# Altium PCB Energy-Meter.PcbDoc
Units mm, origin at the board's own origin, x right, y up, seen from the top; angles counter-clockwise.
Board outline 75 x 75 mm, 2 copper layers (Top Layer, Bottom Layer); 45 components, 30 nets, 147 pads, 8 vias.
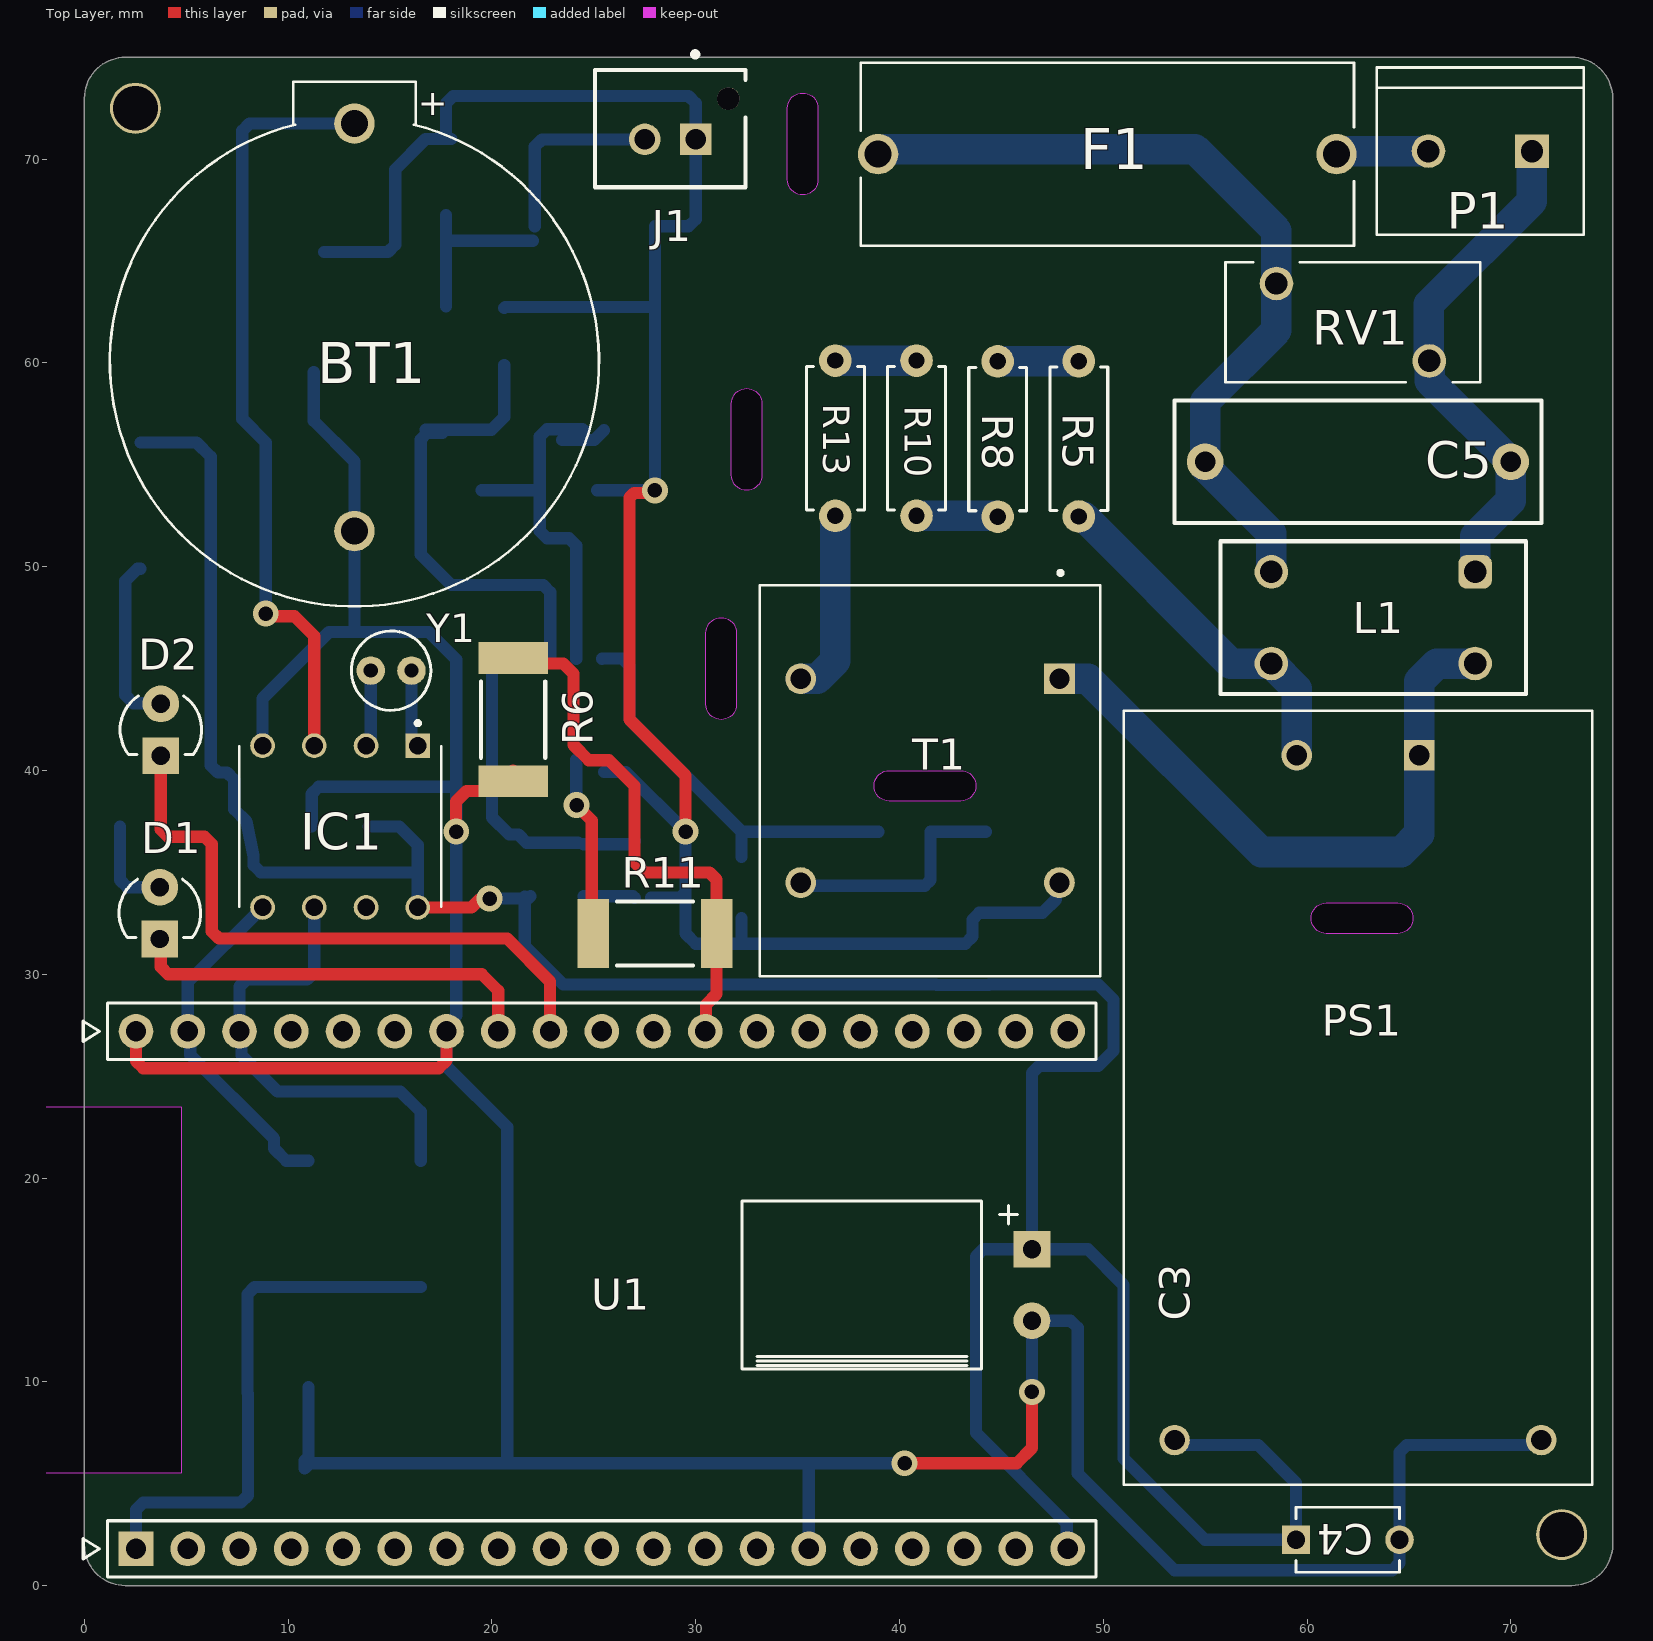
[diagram p0: Top Layer view]
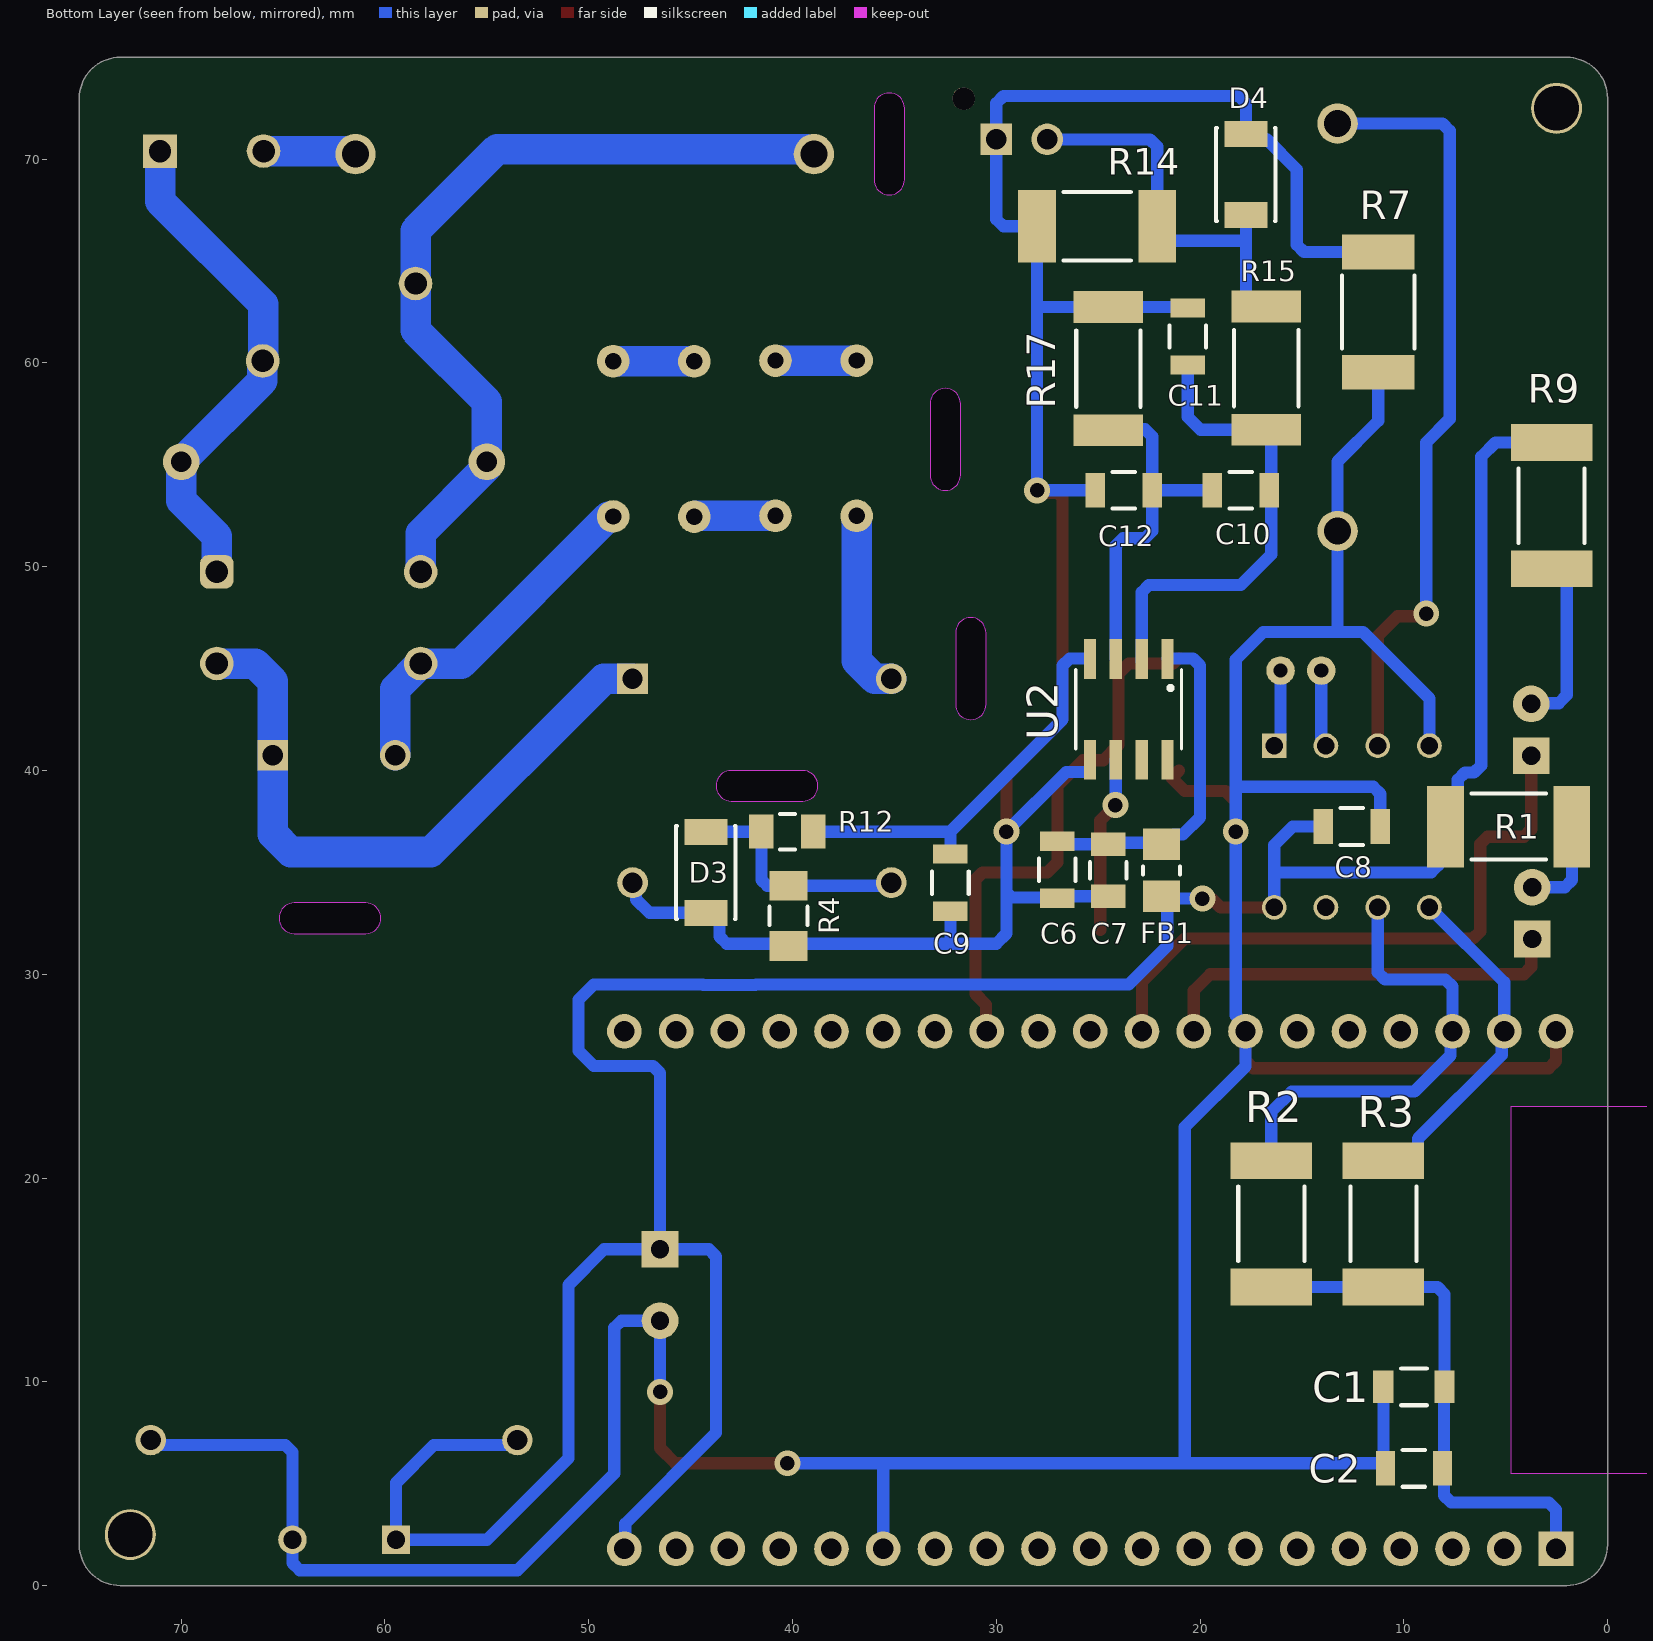
[diagram p1: Bottom Layer view, seen from below]
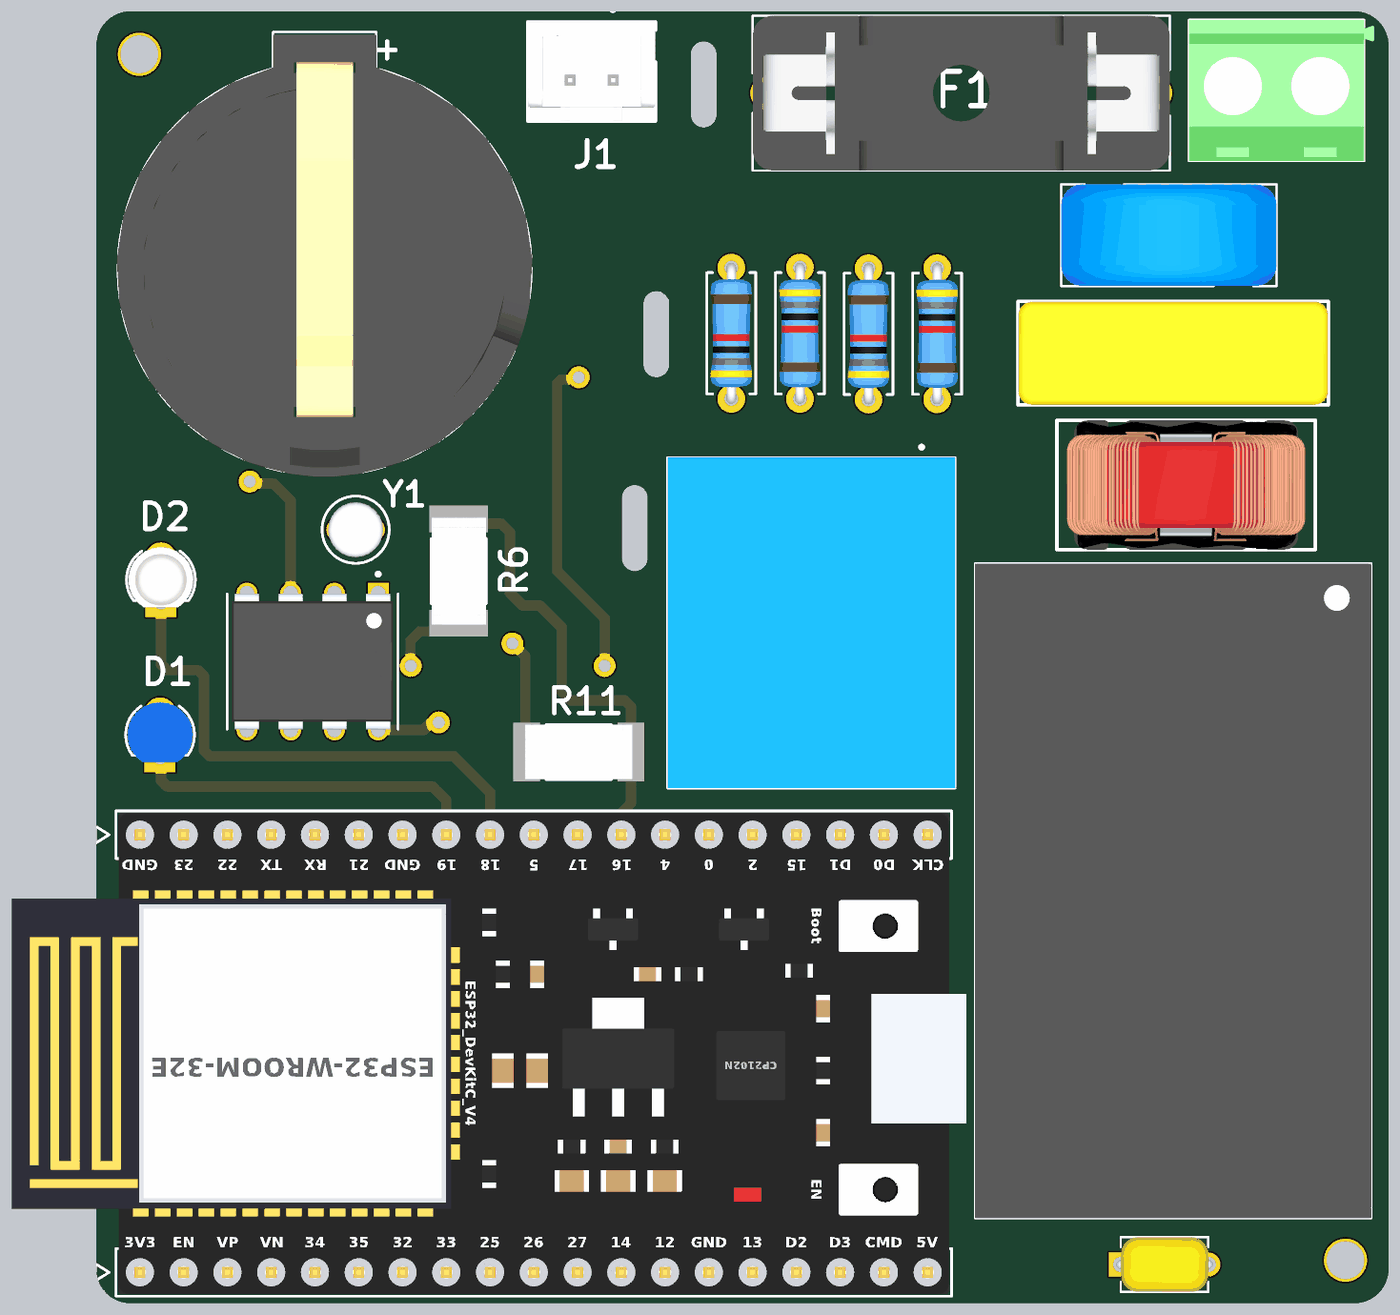
[diagram p2: 3D render of the assembled board from above, using the file's embedded part models]
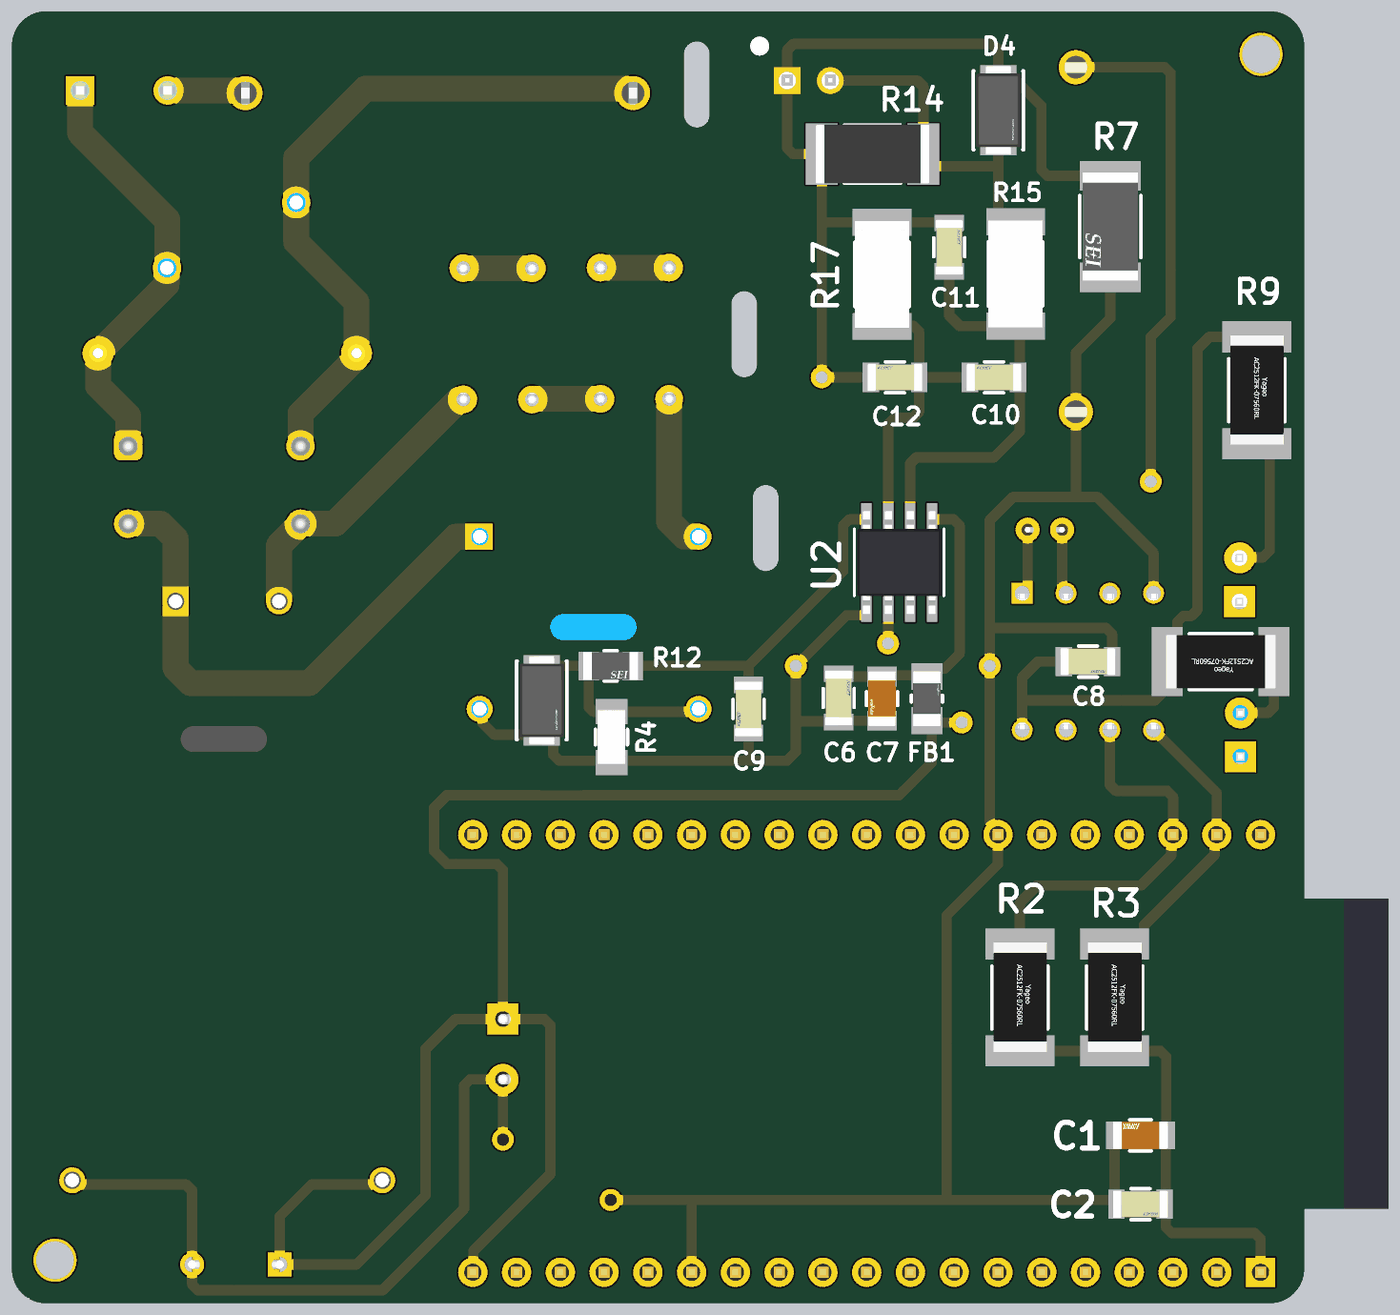
[diagram p3: 3D render of the assembled board from below, using the file's embedded part models]

## Layer stack, top to bottom
Top Solder: solder mask 0.0102, Solder Resist, Dk 3.5
Top Layer: signal copper 0.0356
Dielectric 1: dielectric 0.32, FR-4, Dk 4.8
Bottom Layer: signal copper 0.0356
Bottom Solder: solder mask 0.0102, Solder Resist, Dk 3.5

## Board outline
0,2 0,73 cw(c2,73) 2,75 73,75 cw(c73,73) 75,73 75,2 cw(c73,2) 73,0 2,0 cw(c2,2)
cut-out: 34.5,69 34.5,72.5 cw(c35.25,72.5) 35.25,73.25 cw(c35.25,72.5) 36,72.5 36,69 cw(c35.25,69) 35.25,68.25 cw(c35.25,69)
cut-out: 31.75,54.5 31.75,58 cw(c32.5,58) 32.5,58.75 cw(c32.5,58) 33.25,58 33.25,54.5 cw(c32.5,54.5) 32.5,53.75 cw(c32.5,54.5)
cut-out: 30.5,43.25 30.5,46.75 cw(c31.25,46.75) 31.25,47.5 cw(c31.25,46.75) 32,46.75 32,43.25 cw(c31.25,43.25) 31.25,42.5 cw(c31.25,43.25)
cut-out: 43,38.5 39.5,38.5 cw(c39.5,39.25) 38.75,39.25 cw(c39.5,39.25) 39.5,40 43,40 cw(c43,39.25) 43.75,39.25 cw(c43,39.25)
cut-out: 64.45,32 60.95,32 cw(c60.95,32.75) 60.2,32.75 cw(c60.95,32.75) 60.95,33.5 64.45,33.5 cw(c64.45,32.75) 65.2,32.75 cw(c64.45,32.75)
cut-out: -2.3,5.5 -2.3,23.5 4.75,23.5 4.75,5.5

## Design rules (kind name [scope] priority, off if disabled: settings)
Clearance [All] p1: gap=0.254 ignorepadtopadclearanceinfootprint=FALSE
PolygonConnect [All] p1: connectstyle=Relief reliefconductorwidth=0.254 reliefentries=4 polygonreliefangle="90 Angle" airgapwidth=0.254
RoutingVias [All] p1: holewidth=0.711 width=1.27 viastyle="Through Hole" minholewidth=0.711 minwidth=1.27 maxholewidth=0.711 maxwidth=1.27
SilkToSolderMaskClearance [IsPad] p1: minsilkscreentomaskgap=0.05 clearancetoexposedcopper=TRUE
SolderMaskExpansion [All] p1: expansion=0.102 istentingtop=FALSE
Width [All] p1: maxlimit=2 minlimit=0.4 preferedwidth=0.6
29 further rules are at their usual default settings.

## Components (designator, comment, footprint, x,y, rotation, side; value= is the part's Value field where it differs from the comment)
BT1 "BATT holder" BAT_BH32T-C-G 13.25,60.05 r180 top
C1 "10 µF" FP-1206-L_3_2_0_2-W_1_6_0-MFG 9.5,9.75 r0 bottom
C2 "100 nF" FP-C1206C-EB-MFG 9.5,5.75 r0 bottom value="0.10 μF"
C3 "470uF" CAPPRD350W60D800H1150_LAYDOWN 46.5,14.75 r180 top
C4 "100 nF" CAPRR508W50L508T318H762 62,2.25 r0 top
C5 "0.1uF X2" CAPX2_L18.0-W6.0-H11.0_P15.00 62.5,55.15 r0 top value=0.1uF
C6 "100 nF" FP-C1206C-EB-MFG 27.013,35.137 r270 bottom value="0.10 μF"
C7 "10 µF" FP-GRM31C-0_2-e0_3_0_8-IPC_C 24.5,35.1 r270 bottom
C8 "100 nF" FP-C1206C-EB-MFG 12.55,37.25 r0 bottom value="0.10 μF"
C9 "33 nF" FP-C1206C-EB-MFG 32.25,34.5 r90 bottom value="33,000 pF"
C10 "10 nF" FP-C1206C-EB-MFG 18,53.75 r180 bottom value="10,000 pF"
C11 "1 nF" FP-C1206C-EB-MFG 20.6,61.3 r270 bottom value="1,000 pF"
C12 "1 nF" FP-C1206C-EB-MFG 23.75,53.75 r180 bottom value="1,000 pF"
D1 "LED 3mm Blue" LED_D3.0MM_P2.54_BLUE 3.7,33 r90 top
D2 "LED 3mm White" LED_D3.0MM_P2.54_WHITE 3.75,42 r90 top
D3 "SMAJ5.0CA" FP-SMAJ-MFG 44.25,35 r270 bottom
D4 "SMAJ5.0CA" FP-SMAJ-MFG 17.75,69.25 r270 bottom
F1 "Holder 5x20 + T500mA 250V" FUSE_4628 50.2,70.249 r180 top
FB1 "Ferrite Bead" FP-BLM31-0_2-T1_6-IPC_B 21.893,35.1 r90 bottom
IC1 "DS1307" DIP794W47P254L991H457Q8 12.55,37.25 r270 top
J1 "B2B-XH-A" FP-B2B-XH-AM_LF_SN-MFG 28.75,71.5 r0 top
L1 "744821110" "WE-CMB_Type XS_L15W7.5H18" 63.25,47.5 r180 top
P1 "Terminal Block" TE_282837-2 68.5,70.4 r180 top
PS1 "HLK-5M05" CONV_HLK-5M05 62.5,23.942 r270 top
R1 "330Ω" FP-AC2512-MFG 4.85,37.25 r0 bottom
R2 "4.7KΩ" FP-AC2512-MFG 16.5,17.75 r270 bottom
R3 "4.7KΩ" FP-AC2512-MFG 11,17.75 r270 bottom
R4 "100Ω RES" FP-MCA1206-IPC_A 40.2,32.867 r270 bottom
R5 "47k" RESAD762W55L630D240_MF 48.8,56.279 r270 top
R6 "2kΩ" FP-CRCW2512-E3-IPC_A 21.038,42.5 r270 top
R7 "0Ω RES" FP-RMCF2512-IPC_A 11.25,62.5 r270 bottom
R8 "47k" RESAD762W55L630D240_MF 44.818,56.269 r90 top
R9 "330Ω" FP-AC2512-MFG 2.75,53 r270 bottom
R10 "47k" RESAD762W55L630D240_MF 40.836,56.308 r270 top
R11 "1kΩ" FP-CRCW2512-E3-IPC_A 28,32 r0 top
R12 "1kΩ" FP-RMCF1206-IPC_C 40.25,37 r180 bottom
R13 "47k" RESAD762W55L630D240_MF 36.854,56.308 r90 top
R14 "0.5Ω" RESC6432X89X76ML25T25 25.05,66.707 r180 bottom
R15 "1.5kΩ" FP-CRCW2512-E3-IPC_A 16.75,59.75 r270 bottom
R17 "1.5kΩ" FP-CRCW2512-E3-IPC_A 24.5,59.724 r270 bottom
RV1 "MOV-10D561K" VAR_MOV-10D561K 62.25,62 r0 top
T1 "ZMPT101B" XFMR_ZMPT101B 41.5,39.5 r270 top
U1 "ESP32-DevKitC V4" ESP32-DEVKITC-V4_SOCKET 25.39,14.5 r180 top
U2 "HLW8032" SOIC127P600X175-8N 23.5,43 r270 bottom
Y1 "32.768kHz" XTAL_D3.2XL8.3_P2.00_VERTICAL 15.05,44.904 r180 top

## Footprints (in the part's own frame and the unit in brackets; to place one, negate y for a bottom-side part, rotate by r counter-clockwise, add the part's x,y. Pads: shape width x height; smd on the part's side, far side on the other; paste and mask are expansions set on the pad)
BAT_BH32T-C-G [mil]
  round 78 hole 52: NEG(0,326.77) POS(0,-460.63)
  silkscreen extent -473,-541 473,472, body extent -475,-535 475,475, height 310
CAPPRD350W60D800H1150_LAYDOWN [mm] "Radial electrolytic cap laid down, D8x11.5mm, 3.5mm pitch, leads 0.6mm bent 2mm from seal"
  rect 1.8x1.8 hole 0.9: 1(0,-1.75)
  round 1.8 hole 0.9: 2(0,1.75)
  silkscreen extent 0.7,-4.12 14.22,4.12, body extent -0.3,-4.05 14.11,4.04, height 8.04
CAPRR508W50L508T318H762 [mm]
  rect 1.398x1.398 / inner round 1.398 / far side rect 1.398x1.398 hole 0.89: 1(-2.54,0)
  round 1.398 hole 0.89: 2(2.54,0)
  silkscreen extent -2.54,-1.59 2.54,1.59, body extent -2.79,-1.59 2.79,1.59, height 6.37
CAPX2_L18.0-W6.0-H11.0_P15.00 [mm] "Boxed radial film capacitor, body 18.0 x 6.0 mm footprint x 11.0 mm high, 15.00 mm pitch, 1.00 mm holes. X2 safety cap, 275 VAC"
  round 1.8 hole 1: 1(-7.5,0) 2(7.5,0)
  silkscreen extent -9,-3 9,3, body extent -9,-3 9,3, height 11.5
CONV_HLK-5M05 [mm]
  rect 1.5x1.5 / inner round 1.5 / far side rect 1.5x1.5 hole 1: 1(-16.8,3)
  round 1.5 hole 1: 2(-16.8,-3) 3(16.8,9) 4(16.8,-9)
  silkscreen extent -19,-11.5 19,11.5, body extent -19,-11.5 19,11.5, height 18.05
DIP794W47P254L991H457Q8 [mm]
  rect 1.21x1.21 / inner round 1.21 / far side rect 1.21x1.21 hole 0.86 mask+0.102: 1(-3.97,3.81)
  round 1.21 hole 0.86 mask+0.102: 2(-3.97,1.27) 3(-3.97,-1.27) 4(-3.97,-3.81) 5(3.97,-3.81) 6(3.97,-1.27) 7(3.97,1.27) 8(3.97,3.81)
  silkscreen extent -5.17,-4.95 3.94,4.95, body extent -3.95,-4.69 3.95,4.69, height 4.57
ESP32-DEVKITC-V4_SOCKET [mm] "ESP32-DevKitC V4 socketed on 2x 1x19 female headers 2.54mm H8.5mm, rows 25.4mm apart"
  rect 1.7x1.7 hole 1: 1(22.86,12.7)
  round 1.7 hole 1: 2(20.32,12.7) 3(17.78,12.7) 4(15.24,12.7) 5(12.7,12.7) 6(10.16,12.7) 7(7.62,12.7) 8(5.08,12.7) 9(2.54,12.7) 10(0,12.7) 11(-2.54,12.7) 12(-5.08,12.7) 13(-7.62,12.7) 14(-10.16,12.7) 15(-12.7,12.7) 16(-15.24,12.7) 17(-17.78,12.7) 18(-20.32,12.7) 19(-22.86,12.7) 20(22.86,-12.7) 21(20.32,-12.7) 22(17.78,-12.7) 23(15.24,-12.7) 24(12.7,-12.7) 25(10.16,-12.7) 26(7.62,-12.7) 27(5.08,-12.7) 28(2.54,-12.7) 29(0,-12.7) 30(-2.54,-12.7) 31(-5.08,-12.7) 32(-7.62,-12.7) 33(-10.16,-12.7) 34(-12.7,-12.7) 35(-15.24,-12.7) 36(-17.78,-12.7) 37(-20.32,-12.7) 38(-22.86,-12.7)
  silkscreen extent -24.25,-14.08 25.45,14.08, body extent -25.1,-13.97 30.3,13.97, height 15.71
FP-1206-L_3_2_0_2-W_1_6_0-MFG [mm]
  rect 1x1.6 smd paste+0 mask+0: 1(-1.5,0) 2(1.5,0)
  silkscreen extent -0.63,-0.9 0.63,0.9, body extent -1.6,-0.8 1.6,0.8, height 2.29
FP-AC2512-MFG [mm]
  rect 1.8x4 smd paste+0 mask+0: 1(-3.1,0) 2(3.1,0)
  silkscreen extent -1.83,-1.63 1.83,1.63, body extent -3.19,-1.54 3.16,1.56, height 0.65
FP-B2B-XH-AM_LF_SN-MFG [mm]
  rect 1.55x1.55 hole 1 paste-2539.97 mask+0: 1(1.25,-0.525)
  round 1.55 hole 1 paste-2539.97 mask+0: 2(-1.25,-0.525)
  round 1.1 hole 1.1 unplated paste-2539.97 mask+0: ""(2.85,1.475)
  silkscreen extent -3.7,-2.88 3.7,3.77, body extent -3.8,-2.98 3.8,2.98, height 0.25
FP-BLM31-0_2-T1_6-IPC_B [mm]
  rect 1.554x1.806 smd paste+0 mask+0: 1(-1.276,0) 2(1.276,0)
  silkscreen extent -0.2,-0.9 0.2,0.9, body extent -1.6,-0.8 1.6,0.8, height 1.8
FP-C1206C-EB-MFG [mm]
  rect 0.95x1.7 smd paste+0 mask+0: 1(-1.4,0) 2(1.4,0)
  silkscreen extent -0.55,-0.9 0.55,0.9, body extent -1.6,-0.8 1.6,0.8, height 0.88
FP-CRCW2512-E3-IPC_A [mm]
  rect 1.555x3.408 smd paste+0 mask+0: 1(-3.026,0) 2(3.026,0)
  silkscreen extent -1.87,-1.58 1.87,1.58, body extent -3.15,-1.58 3.15,1.58, height 0.7
FP-GRM31C-0_2-e0_3_0_8-IPC_C [mm]
  rect 1.155x1.706 smd paste+0 mask+0: 1(-1.276,0) 2(1.276,0)
  silkscreen extent -0.4,-0.9 0.4,0.9, body extent -1.6,-0.8 1.6,0.8, height 1.8
FP-MCA1206-IPC_A [mm]
  rect 1.456x1.858 smd paste+0 mask+0: 1(-1.476,0) 2(1.476,0)
  silkscreen extent -0.45,-0.93 0.45,0.93, body extent -1.6,-0.8 1.6,0.8, height 0.65
FP-RMCF1206-IPC_C [mm]
  rect 1.204x1.658 smd paste+0 mask+0: 1(-1.276,0) 2(1.276,0)
  silkscreen extent -0.37,-0.87 0.37,0.87, body extent -1.6,-0.8 1.6,0.8, height 0.7
FP-RMCF2512-IPC_A [mm]
  rect 1.704x3.555 smd paste+0 mask+0: 1(-2.951,0) 2(2.951,0)
  silkscreen extent -1.8,-1.78 1.8,1.78, body extent -3.15,-1.6 3.15,1.6, height 0.7
FP-SMAJ-MFG [mm]
  rect 1.27x2.1 smd paste+0 mask+0: 1(-1.985,0) 2(1.985,0)
  silkscreen extent -2.28,-1.46 2.28,1.46, body extent -2.61,-1.3 2.61,1.3, height 2.62
FUSE_4628 [mm]
  round 1.98 hole 1.32: 1(-11.25,0) 2(11.25,0)
  silkscreen extent -12.1,-4.49 12.1,4.49, body extent -12.1,-4.5 12.1,4.5, height 11.99
LED_D3.0MM_P2.54_BLUE [mm] "3mm round LED (blue, diffused), upright, 2.54mm pitch, pad 1 = cathode"
  rect 1.8x1.8 hole 0.9: 1(-1.27,0)
  round 1.8 hole 0.9: 2(1.27,0)
  silkscreen extent -1.2,-2 1.67,2, body extent -1.9,-1.9 1.9,1.9, height 5.6
LED_D3.0MM_P2.54_WHITE [mm] "3mm round LED (white, diffused), upright, 2.54mm pitch, pad 1 = cathode"
  rect 1.8x1.8 hole 0.9: 1(-1.27,0)
  round 1.8 hole 0.9: 2(1.27,0)
  silkscreen extent -1.2,-2 1.67,2, body extent -1.9,-1.9 1.9,1.9, height 5.6
RESAD762W55L630D240_MF [mm] "Axial resistor (metal film), horizontal, 7.62mm (300mil) pitch, body 6.3x2.4mm, lead 0.55mm"
  round 1.6 hole 0.8: 1(-3.81,0) 2(3.81,0)
  silkscreen extent -3.52,-1.42 3.52,1.42, body extent -4.09,-1.21 4.09,1.21, height 2.41
RESC6432X89X76ML25T25 [mm] "Chip Resistor, 2-Leads, Body 6.6x3.43mm, IPC Low Density"
  rect 1.85x3.55 smd: 1(-2.95,0) 2(2.95,0)
  silkscreen extent -1.65,-1.68 1.65,1.68, body extent -3.3,-1.72 3.3,1.72, height 0.89
SOIC127P600X175-8N [mm] "SOP-8, body 3.90 x 4.90 mm, lead span 6.00 mm, pitch 1.27 mm, height 1.75 mm max. IPC-7351B nominal. HLW8032 / SOIC127P600X175-8N"
  rect 1.95x0.6 smd: 1(-2.475,1.905) 2(-2.475,0.635) 3(-2.475,-0.635) 4(-2.475,-1.905) 5(2.475,-1.905) 6(2.475,-0.635) 7(2.475,0.635) 8(2.475,1.905)
  silkscreen extent -1.95,-2.6 1.95,2.6, body extent -3,-2.45 3,2.45, height 1.6
TE_282837-2 [mm]
  rect 1.65x1.65 / inner round 1.65 / far side rect 1.65x1.65 hole 1.1: 1(-2.54,0)
  round 1.65 hole 1.1: 2(2.54,0)
  silkscreen extent -5.08,-4.1 5.08,4.1, body extent -5.68,-4.1 5.08,4.1, height 10
VAR_MOV-10D561K [mm]
  round 1.65 hole 1.1: 1(-3.75,1.9) 2(3.75,-1.9)
  silkscreen extent -6.25,-2.95 6.25,2.95, body extent -6.25,-2.95 6.25,2.95, height 15.5
"WE-CMB_Type XS_L15W7.5H18" [mm] "Common Mode Power Line Choke, 4-Leads, body 15x7.5mm"
  rrect50% 1.65x1.65 hole 1.1: 1(-5,-2.25)
  round 1.65 hole 1.1: 2(5,-2.25) 3(5,2.25) 4(-5,2.25)
  silkscreen extent -7.5,-3.75 7.5,3.75, body extent -6.92,-3.75 6.92,3.75, height 17.57
XFMR_ZMPT101B [mm]
  rect 1.508x1.508 / inner round 1.508 / far side rect 1.508x1.508 hole 1: 1(-5,6.35)
  round 1.508 hole 1: 2(-5,-6.35) 3(5,-6.35) 4(5,6.35)
  silkscreen extent -10.3,-8.35 9.6,8.35, body extent -9.6,-8.35 9.6,8.35, height 18.8
XTAL_D3.2XL8.3_P2.00_VERTICAL [mm] "Cylindrical watch crystal, 3.2 mm dia x 8.3 mm can, through hole vertical, 2.00 mm pitch, 0.70 mm holes. AB38T / ECS-3X8 / DT-38 and equivalents"
  round 1.4 hole 0.7: 1(-1,0) 2(1,0)
  silkscreen extent -1.95,-1.95 1.95,1.95, body extent -1.6,-1.59 1.6,1.59, height 9.3

## Part data
BT1: library part BH32T-C-G, "BATTERY HOLDER COIN 20MM PC PIN", Manufacturer=MPD, Manufacturer Part Number=BH32T-C-G
C1: library part CMP-04427-021870-1, "General Purpose Ceramic Capacitor, 1206, 10uF, 10%, X5R, 15%, 10V", Capacitance=10uF, Case Code (Imperial)=1206, Case Code (Metric)=3216, Dielectric=X5R, Manufacturer="KYOCERA AVX", Manufacturer Part Number=1206ZD106KAT2A, Max Operating Temperature=85°C, Min Operating Temperature=-55°C, Package Quantity=1, Tolerance=10%, Voltage=10V, Case/Package=1206, Construction=Flat, Contact Plating=Tin, Depth=1.6mm, Height=0.07mm, Lead Free="Lead Free", Length=3.2mm, Mount="Surface Mount", Number of Pins=2, Packaging="Tape and Reel", Radiation Hardening=No, REACH SVHC="No SVHC", RoHS Compliant=Yes, Series=-, Size=1.78mm, Termination=SMD/SMT, Thickness=0.07inch, Voltage Rating=10V, Voltage Rating (DC)=10V, Width=0.063inch
C2 C6 C8: library part CMP-03020-014296-1, "CAP CER 0.1UF 25V X7R 1206", Capacitance="0.10 μF", Manufacturer=KEMET, Manufacturer Part Number=C1206C104J3RACTU, Package=C1206C-EB, Temperature="-55°C to +150°C", Temperature Characteristic=X7R, Temperature Coefficient=15%, Temperature Range High=+150°C, Temperature Range Low=-55°C, Tolerance=0.05, Voltage Rating="25 V", Automotive=Yes, Automotive Grade="Grade 0", Category=Cap, ComponentLink2Description=Datasheet, ComponentLink2URL=https://content.kemet.com/datasheets/KEM_C1007_X8R_ULTRA_150C_SMD.pdf, Device Class L1="Passive Components", Device Class L2=Capacitors, Device Class L3="Ceramic Capacitors", Digikey Description="CAP CER 0.1UF 25V X7R 1206", Height=0.88mm, Ipc Land Pattern Name=CAPC320160X78, Lead Free=Yes, Material=Ceramic, Mouser Description="Cap Ceramic 0.1uF 25V X7R 5% SMD 1206 125°C Plastic T/R", Octopart=https://octopart.com/c1206c104j3ractu-kemet-9140182, RoHS=TRUE
C3: library part CAP_POL_470UF_10V_D8X11.5_LD, "Capacitor, aluminium electrolytic, 470 uF, 10 V, 20%, radial D8x11.5mm, 3.5mm pitch, laid down", Capacitance="470 µF", Case Size="D8 x L11.5 mm", Manufacturer=Rubycon, Manufacturer Part Number=10YXF470MEFC8X11.5, Operating Temperature="-40°C ~ +105°C", Tolerance=±20%, Voltage Rating=10V, ComponentLink1Description="Product page", ComponentLink1URL=https://www.digikey.com/product-detail/en/rubycon/10YXF470MEFC8X11-5/1189-1868-ND/3563329, Lead Diameter=0.6mm, Lead Spacing=3.5mm, Lifetime="6000h @ 105°C", Mounting="THT, laid down (horizontal), leads bent 2mm from seal", Polarized=Yes, Technology="Aluminium Electrolytic"
C4: library part AR215C104K4R, "AR 100nF Ceramic Multilayer Cap,50V dc,+125C,X7R Dielectric,+/-10%,Through Hole", Manufacturer=AVX, Package="Radial AVX", Manufacturer Part Number=AR215C104K4R
C5: library part CAP-X2-0.1uF-275VAC, "Capacitor 0.1uF +/-10%, 275 VAC class X2, MKP polypropylene film, 40/100/21, radial through hole, 15 mm pitch", Dielectric="MKP polypropylene film", Manufacturer=TDK, Manufacturer Part Number=B32922C3104K000, Package="Boxed radial 18.0 x 11.0 x 6.0, P15", Tolerance="+/-10% (K)", Voltage="305 VAC X2", Climatic Category=40/100/21, Safety Class="X2, EN60384-14"
C7: library part CMP-06035-005515-1, "Chip Multilayer Ceramic Capacitors for General Purpose, 1206, 10uF, X7R, 15%, 10%, 25V", Capacitance=10uF, Case/Package=1206, Dielectric=X7R, Manufacturer=Murata, Manufacturer Part Number=GRM31CR71E106KA12L, Max Operating Temperature=125°C, Min Operating Temperature=-55°C, Tolerance=10%, Voltage=25V, Lead Free="Lead Free", Length=0.126inch, Mount="Surface Mount", Packaging="Tape and Reel", Thickness=0.071inch, Voltage Rating=25V, Voltage Rating (DC)=25V, Width=0.063inch
C9: library part CMP-03020-013243-1, "C1206 33,000 pF C0G 5.00% 50 V", Capacitance="33,000 pF", Manufacturer=KEMET, Manufacturer Part Number=C1206C333J5GACAUTO, Package=C1206C-EB, Temperature="-55°C to +150°C", Temperature Characteristic=C0G, Temperature Coefficient=15%, Temperature Range High=+150°C, Temperature Range Low=-55°C, Tolerance=0.05, Voltage Rating="50 V", Automotive=Yes, Automotive Grade="Grade 0", Category=Cap, ComponentLink2Description=Datasheet, ComponentLink2URL=https://content.kemet.com/datasheets/KEM_C1007_X8R_ULTRA_150C_SMD.pdf, Device Class L1="Passive Components", Device Class L2=Capacitors, Device Class L3="Ceramic Capacitors", Height=0.88mm, Ipc Land Pattern Name=CAPC320160X78, Lead Free=Yes, Material=Ceramic, Octopart=https://octopart.com/c1206c333j5gacauto-kemet-84841138, RoHS=TRUE
C10: library part CMP-03020-012568-1, "CAP CER 10000PF 100V C0G 1206", Capacitance="10,000 pF", Manufacturer=KEMET, Manufacturer Part Number=C1206C103J1GACAUTO, Package=C1206C-EB, Temperature="-55°C to +150°C", Temperature Characteristic=C0G, Temperature Coefficient=15%, Temperature Range High=+150°C, Temperature Range Low=-55°C, Tolerance=0.05, Voltage Rating="100 V", Automotive=Yes, Automotive Grade="Grade 0", Category=Cap, ComponentLink2Description=Datasheet, ComponentLink2URL=https://content.kemet.com/datasheets/KEM_C1007_X8R_ULTRA_150C_SMD.pdf, Device Class L1="Passive Components", Device Class L2=Capacitors, Device Class L3="Ceramic Capacitors", Digikey Description="CAP CER 10000PF 100V C0G 1206", Height=0.88mm, Ipc Land Pattern Name=CAPC320160X78, Lead Free=Yes, Material=Ceramic, Octopart=https://octopart.com/c1206c103j1gacauto-kemet-84841126, RoHS=TRUE
C11 C12: library part CMP-03020-025981-1, "C1206 1,000 pF C0G 5.00% 200 V", Capacitance="1,000 pF", Manufacturer=KEMET, Manufacturer Part Number=C1206C102J2GACAUTO, Package=C1206C-EB, Temperature="-55°C to +150°C", Temperature Characteristic=C0G, Temperature Coefficient=15%, Temperature Range High=+150°C, Temperature Range Low=-55°C, Tolerance=0.05, Voltage Rating="200 V", Automotive=Yes, Automotive Grade="Grade 0", Category=Cap, ComponentLink2Description=Datasheet, ComponentLink2URL=https://content.kemet.com/datasheets/KEM_C1007_X8R_ULTRA_150C_SMD.pdf, Device Class L1="Passive Components", Device Class L2=Capacitors, Device Class L3="Ceramic Capacitors", Height=0.88mm, Ipc Land Pattern Name=CAPC320160X78, Lead Free=Yes, Material=Ceramic, Octopart=https://octopart.com/c1206c102j2gacauto-kemet-65740696, RoHS=TRUE
D1: library part LED_3MM_BLUE_DIFFUSED, "LED, 3mm round, blue diffused, THT 2.54mm", Emitting Color=Blue, Forward Current="20mA typ / 30mA max", Forward Voltage="3.3V typ / 4.0V max @ 20mA", Manufacturer=Kingbright, Manufacturer Part Number=WP710A10QBD/D, Operating Temperature="-40°C ~ +85°C", Package="3mm (T-1) round, 2.54mm lead spacing", Reverse Voltage=5V, Series Resistor @5V="91-100 ohm (~17mA)", ComponentLink1Description="Part info", ComponentLink1URL=https://octopart.com/part/kingbright/WP710A10QBD%2FD, Lens="Blue diffused", Mounting="THT upright, flange ~1mm above board", Polarity="Pin 1 = K (cathode, square pad, flange flat, short lead); Pin 2 = A", Viewing Angle="50 deg (diffused)", Wavelength="460nm peak"
D2: library part LED_3MM_WHITE_DIFFUSED, "LED, 3mm round, white diffused, THT 2.54mm", Emitting Color="White (cool white, ~6500K)", Forward Current="20mA typ / 30mA max", Forward Voltage="3.2V typ / 3.6V max @ 20mA", Manufacturer=Kingbright, Manufacturer Part Number=L-7104QWC-D, Operating Temperature="-40°C ~ +85°C", Package="3mm (T-1) round, 2.54mm lead spacing", Reverse Voltage=5V, Series Resistor @5V="100 ohm (~18mA)", Lens="Water clear", Mounting="THT upright, flange ~1mm above board", Polarity="Pin 1 = K (cathode, square pad, flange flat, short lead); Pin 2 = A", Viewing Angle="~60 deg (diffused)"
D3 D4: library part CMP-2000-07091-2, "TVS DIODE 5V 9.2V SMA", Breakdown Voltage=6.4V, Manufacturer="Bourns Inc.", Max Junction Temp=+150°C, Package=SMAJ, Peak Pulse Power=400W, Reverse Standoff Voltage=5V, Temperature="-55°C to +150°C", Temperature Range Low=-55°C, Automotive=No, Category=Diode, ComponentLink2Description=Datasheet, ComponentLink2URL=https://bourns.com/data/global/pdfs/SMAJ.pdf, Device Class L1="Circuit Protection", Device Class L2="TVS Diodes", Device Class L3=unset, Digikey Description="TVS DIODE 5V 9.2V SMA", Direction=Bidirectional, Height=2.62mm, Lead Free=Yes, Manufacturer Part Number=SMAJ5.0CA, Mouser Description="TVS Diodes - Transient Voltage Suppressors 5volts 800/1600uA 43.5 Amps Bi-Dir", Number Of Channels=1, Octopart=https://octopart.com/smaj5.0ca-bourns-12809390, RoHS=TRUE, Standoff Height=0.05mm, Temperature Range High=+150°C
F1: library part 4628, "5mm Slim Line Fuse holder", Manufacturer=Keystone, Fuse Insert="Littelfuse 0215.500MXP (T500mA 250VAC ceramic 1.5kA)", Manufacturer Part Number=4628
FB1: library part CMP-06046-002432-1, "Chip Ferrite Bead, 1206, 600Ω @ 100MHz, 0.038Ω, 25%, 2.9A", Case Code (Imperial)=1206, Case Code (Metric)=3216, DC Resistance (DCR)=38mR, Manufacturer=125°C, Max Current Rating=2.9A, Min Operating Temperature=-55°C, Case/Package=1206, Manufacturer Part Number=125°C, Max Operating Temperature=125°C, Mount="Surface Mount", Number of Lines=1, Packaging="Cut Tape"
IC1: "Real Time Clock (RTC) I²C, 56 B RAM, 8-DIP", Manufacturer="Analog Devices", Manufacturer Part Number=DS1307+, Package="DIP-8 Maxim Integrated"
J1: library part CMP-17439-000037-1, "CONN HEADER VERT 2POS 2.5MM", Color=Green, Contact Resistance=20mR, Housing Color=White, Manufacturer=JST, Manufacturer Part Number=B2B-XH-AM(LF)(SN), Max Current Rating=3A, Max Operating Temperature=85°C, Max Voltage Rating (AC)=250V, Min Operating Temperature=-25°C, Connector Type="Male Pin", Contact Material=Brass, Contact Plating=Tin, Contact Type="Male Pin", Depth=5.75mm, Fastening Type=Detent, Housing Material=Polyamide, Lead Free="Lead Free", Length=7.4mm, Mount="Through Hole", Number of Positions=2, Number of Rows=1, Orientation=Straight, Packaging=Bulk, Pitch=2.5mm, Series=XH, Termination=Solder
L1: library part CMP-0223-00077-2, Ambient Temperature Range High=70°C, Ambient Temperature Range Low=-40°C, Case/Package=Radial, Current=700mA, DC Resistance (DCR)=350mΩ, Inductance=10mH, Inductance Tolerance=30%, Manufacturer="Wurth Elektronik", Max Operating Temperature=125°C, Resistance=350MΩ, Test Frequency=10kHz, Voltage Rating=250V, Current Rating=700mA, DC Current=700mA, Depth=7.5mm, Height=18mm, Lead Free="Lead Free", Lead Pitch=4.5mm, Length=15mm, Manufacturer Part Number=744821110, Max DC Current=700mA, Min Operating Temperature=-40°C, Mount="Radial, Through Hole", NexarPartId=22865126, Number of Lines=2, Number of Pins=4, Packaging=Bulk, Pin Length=2.5mm, REACH SVHC="No SVHC", RoHS=Compliant, Series Resistance=350mΩ, Termination=Radial, Tolerance=30%, Width=7.5mm
P1: library part 282837-2, "Ð Ð°Ð·ÑŠÐµÐ¼Ð½Ñ‹Ðµ ÐºÐ»ÐµÐ¼Ð¼Ð½Ñ‹Ðµ ÐºÐ¾Ð»Ð¾Ð´ÐºÐ¸ Ð Ð¾Ð·ÐµÑ‚ÐºÐ° 2 Ð¿Ð¾Ð»Ð¾Ð¶ÐµÐ½Ð¸Ñ 5,08 Ð¼Ð¼ ÐŸÑ€Ð¸Ð¿Ð¾Ð¹ Ð¿Ñ€ÑÐ¼Ð¾Ð¹ Ñ‡ÐµÑ€ÐµÐ· Ð¾Ñ‚Ð²ÐµÑ€ÑÑ‚Ð¸Ðµ 13,5 Ð / ÐºÐ¾Ð½Ñ‚Ð°ÐºÑ‚", Manufacturer="TE Connectivity", Manufacturer Part Number=282837-2
PS1: "AC DC 220V to 5V 5W 5Watt Isolated Switching Step-Down Power Supply Module Converter", Manufacturer=Hi-link, Manufacturer Part Number=HLK-5M05
R1 R9: library part CMP-03412-030391-1, "RES SMD 330 OHM 5% 1W 2512", Manufacturer=Yageo, Manufacturer Part Number=AC2512JK-07330RL, Package=AC2512, Power Rating=1W, Temperature="-55°C to +155°C", Temperature Range High=+155°C, Temperature Range Low=-55°C, Tolerance=0.05, Voltage Rating=200V, Automotive=Yes, Automotive Grade="Grade 0", Category=Res, ComponentLink2Description=Datasheet, ComponentLink2URL=http://www.yageo.com/documents/recent/PYu-AC_51_RoHS_L_6.pdf, Composition="Thick Film", Device Class L1="Passive Components", Device Class L2=Resistors, Device Class L3="Chip SMD Resistors", Digikey Description="RES SMD 330 OHM 5% 1W 2512", Footprint Url=http://www.yageo.com/exep/pages/download/literatures/PYu-R_Mount_10.pdf, Height=0.65mm, Ipc Land Pattern Name=RESC635310X55, Lead Free=Yes, Octopart=https://octopart.com/ac2512jk-07330rl-yageo-71370368, Resistance=330Ω, RoHS=TRUE, Series=AC
R2 R3: library part CMP-03412-032212-1, "RES SMD 4.7K OHM 1% 1W 2512", Manufacturer=Yageo, Manufacturer Part Number=AC2512FK-074K7L, Package=AC2512, Power Rating=1W, Temperature="-55°C to +155°C", Temperature Range High=+155°C, Temperature Range Low=-55°C, Tolerance=0.01, Voltage Rating=200V, Automotive=Yes, Automotive Grade="Grade 0", Category=Res, ComponentLink2Description=Datasheet, ComponentLink2URL=http://www.yageo.com/documents/recent/PYu-AC_51_RoHS_L_6.pdf, Composition="Thick Film", Device Class L1="Passive Components", Device Class L2=Resistors, Device Class L3="Chip SMD Resistors", Digikey Description="RES SMD 4.7K OHM 1% 1W 2512", Footprint Url=http://www.yageo.com/exep/pages/download/literatures/PYu-R_Mount_10.pdf, Height=0.65mm, Ipc Land Pattern Name=RESC635310X55, Lead Free=Yes, Octopart=https://octopart.com/ac2512fk-074k7l-yageo-71370127, Resistance=4.7KΩ, RoHS=TRUE, Series=AC
R4: library part CMP-02407-001396-1, "Res MC AT Precision Thin Film 1206 100Ω 0.1% 0.4W ±25ppm/°C Molded Paper T/R", Case Code (Imperial)=1206, Case Code (Metric)=3216, Manufacturer=Vishay, Manufacturer Part Number=MCA1206MD1000BP100, Max Operating Temperature=155°C, Max Power Dissipation=400mW, Min Operating Temperature=-55°C, Package Quantity=1000, Resistance=100R, Temperature Coefficient=25ppm/°C, Tolerance=0.1%, Voltage Rating=200V, Case/Package=1206, Composition="Thin Film", Features="Automotive AEC-Q200", Height=0.026inch, Length=0.126inch, Number of Terminations=2, Packaging="Tape and Reel", Power Rating=400mW, Termination=SMD/SMT, Weight=0.000325oz, Width=1.6mm
R5 R8 R10 R13: library part RES_47K_0.25W_1PCT_MF_7.62MM, "Resistor, 47 kOhm, 1%, 0.25 W, metal film, axial THT, 7.62 mm pitch", Color Code="Yellow-Violet-Black-Red-Brown (5 band)", Manufacturer=YAGEO, Manufacturer Part Number=MFR-25FRF52-47K, Operating Temperature="-55°C ~ +155°C", Package="Axial, 7.62mm (0.3in) pitch, horizontal", Power="0.25W (1/4W)", Resistance="47 kOhm", Temperature Coefficient=±100ppm/°C, Tolerance=±1%, Voltage Rating=250V, Body Size="6.3mm x 2.4mm dia", ComponentLink1Description=Datasheet, ComponentLink1URL=https://yageogroup.com/content/Resource%20Library/Datasheet/YAGEO-MFR_DATASHEET.pdf, Lead Diameter=0.55mm, Technology="Metal Film"
R6: library part CMP-02407-009223-1, "RES Thick Film, 2kΩ, 1%, 1W, 100ppm/°C, 2512", Case Code (Imperial)=2512, Case Code (Metric)=6432, Manufacturer=Vishay, Manufacturer Part Number=CRCW25122K00FKEG, Max Operating Temperature=155°C, Max Power Dissipation=1W, Min Operating Temperature=-55°C, Package Quantity=10, Resistance=2kR, Temperature Coefficient=100ppm/°C, Tolerance=1%, Voltage Rating=500V, Case/Package=2512, Composition="Thick Film", Contact Plating=Tin, Depth=3.15mm, Features="Automotive AEC-Q200", Height=0.6mm, Lead Free="Lead Free", Length=6.3mm, Military Standard=Not, Number of Pins=2, Number of Terminations=2, Packaging="Tape and Reel", Power Rating=1W, Radiation Hardening=No, Termination=SMD/SMT, Voltage Rating (DC)=500V, Weight=0.001429oz, Width=0.124inch
R7: library part CMP-26527-000191-1, "0Ω ±0 1W 2512 Thick Film Chip Resistor AEC-Q200 compliant", Case Code (Imperial)=2512, Case Code (Metric)=6432, Manufacturer=Stackpole, Manufacturer Part Number=RMCF2512ZT0R00, Max Operating Temperature=155°C, Max Power Dissipation=1W, Min Operating Temperature=-55°C, Resistance=0R, Resistor Type="Thick Film", Temperature Coefficient=200ppm/°C, Tolerance=5%, Case/Package=2512, Construction=Rectangular, Contact Plating=Tin, Depth=3.2mm, Features="Automotive AEC-Q200", Height=0.028inch, Lead Free="Lead Free", Length=6.3mm, Military Standard=Not, Mount="Surface Mount", Number of Terminations=2, Packaging="Tape and Reel", Power Rating=1W, Radiation Hardening=No, RoHS Compliant=Yes, Series=RMCF, Size Code=2512, Width=0.126inch
R11: library part CMP-02407-005908-1, "RES Thick Film, 1kΩ, 1%, 1W, 100ppm/°C, 2512", Case/Package=2512, Manufacturer=Vishay, Manufacturer Part Number=CRCW25121K00FKEH, Max Operating Temperature=155°C, Max Power Dissipation=1W, Min Operating Temperature=-55°C, Resistance=1kR, Temperature Coefficient=100ppm/°C, Tolerance=1%, Composition="Thick Film", Depth=3.15mm, Features="Automotive AEC-Q200", Height=0.028inch, Lead Free="Lead Free", Length=0.248inch, Military Standard=Not, Number of Terminations=2, Packaging="Tape and Reel", Power Rating=1W, Width=0.124inch
R12: library part CMP-26527-005571-1, "1kΩ ±1% 0.25W 1206 Thick Film Chip Resistor AEC-Q200 compliant", Case/Package=1206, Manufacturer=155°C, Max Power Dissipation=250mW, Min Operating Temperature=-55°C, Package Quantity=10000, Resistance=1kR, Resistor Type="Thick Film", Temperature Coefficient=100ppm/°C, Tolerance=1%, Contact Plating=Tin, Features="Automotive AEC-Q200", Height=0.028inch, Length=0.126inch, Manufacturer Part Number=155°C, Max Operating Temperature=155°C, Mount="Surface Mount", Number of Terminations=2, Packaging="Tape and Reel", Radiation Hardening=No, RoHS Compliant=Yes, Series=RMCF, Width=0.063inch
R14: library part CMP-1666-00017-2, "Chip Resistor, 0.5 Ohm, +/- 1%, 1 W, -65 to 275 degC, 2512 (6432 Metric), RoHS, Tape and Reel", Case Code (Imperial)=2512, Case Code (Metric)=6432, Manufacturer=Vishay, Manufacturer Part Number=WSLT2512R5000FEA, Max Operating Temperature="275 degC", Min Operating Temperature="-65 degC", Resistance="0.5 Ohm", Tolerance=1%, Case/Package=2512, ComponentLink1Description="Manufacturer URL", ComponentLink1URL=http://www.vishay.com/, ComponentLink2Description=Datasheet, ComponentLink2URL=http://www.farnell.com/datasheets/1813046.pdf, DatasheetVersion=11/2011, Height="0.635 mm", Length="6.35 mm", Mounting Technology="Surface Mount", PackageDescription="2-Pin Surface Mount Device, Body 6.35 x 3.18 mm", Packaging="Tape and Reel", Radiation Hardening=No, REACH SVHC=Unknown, RoHSCompliant=True, Width="3.2 mm"
R15 R17: library part CMP-02407-008685-1, "RES Thick Film, 1.5kΩ, 1%, 1W, 100ppm/°C, 2512", Case Code (Imperial)=2512, Case Code (Metric)=6332, Manufacturer=Vishay, Manufacturer Part Number=CRCW25121K50FKEG, Max Operating Temperature=155°C, Max Power Dissipation=1W, Min Operating Temperature=-55°C, Package Quantity=10, Resistance=1.5kR, Temperature Coefficient=100ppm/°C, Tolerance=1%, Voltage Rating=500V, Case/Package=2512, Composition="Thick Film", Contact Plating=Tin, Depth=3.15mm, Features="Automotive AEC-Q200", Height=0.028inch, Lead Free="Lead Free", Length=6.3mm, Military Standard=Not, Number of Terminations=2, Packaging="Tape and Reel", Power Rating=1W, Radiation Hardening=No, Termination=SMD/SMT, Voltage Rating (DC)=500V, Weight=0.001429oz, Width=0.124inch
RV1: "560 V 2.5 kA Varistor 1 Circuit Through Hole Disc 10mm", Manufacturer=Bourns, Manufacturer Part Number=MOV-10D561K
T1: "Current-type Voltage Transformer", Manufacturer="Qingxian Zeming Langxi Electronic", Manufacturer Part Number=ZMPT101B
U1: library part ESP32-DEVKITC-V4, "Espressif ESP32-DevKitC V4 (ESP32-WROOM-32E) dev board, socketed on 2x19 female headers", Manufacturer="Espressif Systems", Manufacturer Part Number=ESP32-DEVKITC-32E, ComponentLink1Description="User guide / pinout", ComponentLink1URL=https://docs.espressif.com/projects/esp-dev-kits/en/latest/esp32/esp32-devkitc/user_guide.html, ComponentLink2Description=DigiKey, ComponentLink2URL=https://www.digikey.com/en/products/detail/espressif-systems/ESP32-DEVKITC-32E/12091810, Free Space Under Module="22.8mm wide x 48mm long x 11.0mm high (between header rows)", Header Parts="2x 1x19 female header 2.54mm, 8.5mm (order separately)", Module="ESP32-WROOM-32E, 4 MB flash", Module PCB Bottom Height="11.0mm above board", Mounting="Socketed: 2x 1x19 female header 2.54mm, 8.5mm tall, rows 25.4mm apart", Pin Notes="IO6-IO11 used by SPI flash; IO16/IO17 reserved on WROVER boards; IO34-39 input only", Supply="5V on pin 19 or USB, 3V3 on pin 1"
U2: "High-precision single-phase energy metering IC, dual sigma-delta ADC, UART 4800bps, PF pulse output, 5V, SOP-8", Manufacturer="Hiliwei Tech", Package="SOP-8 (150mil)", Supply Voltage=5V, HelpURL=https://datasheet.lcsc.com/lcsc/2307271600_Hiliwei-Tech-HLW8032_C128023.pdf, Manufacturer Part Number=HLW8032, Supplier Part=C128023
Y1: library part XTAL-32.768kHz, "Crystal 32.768 kHz, 12.5 pF, +/-20 ppm, tuning fork, 3 x 8 mm cylindrical can, through hole, vertical", Load Capacitance=12.5pF, Manufacturer=Abracon, Manufacturer Part Number=AB38T-32.768KHZ, Package="Cylinder D3.2 x L8.3 (3x8mm)", Tolerance=+/-20ppm, ESR="30kOhm max", HelpURL=https://abracon.com/Resonators/AB38T.pdf

## Free pads (board coordinates)
  round 2.5 hole 2.2: 2(2.5,72.5) 2(72.5,2.5)

## Via types
v1: diameter 1.27, hole 0.711, Top Layer to Bottom Layer, 8 vias

## Nets (pads, with @x,y where several pads share a name; then routed paths per layer and width w, separated by ;. In a path a pad name is that pad's centre, name@x,y a point inside that pad or via, vN(x,y) a via of type N, cw(c..) or ccw(c..) an arc to the next point about the centre after c; other vN are vias at no path point)
+3V3: C1.1 C2.1 R2.2 R3.2 U1.1 | length 26.2
  Bottom Layer w0.6: U1.1 2.53,3.722 2.881,4.074 7.676,4.074 8.027,4.425 C1.1@8.027,9.423 ; C1.1@8,9.45 8,14.299 8.351,14.65 R2.2
+5V: C3.1 C4.1 C8.2 FB1.1 IC1.8 PS1.4 R1.2 R9.1 U1.19 | length 145
  Top Layer w0.6: IC1.8@16.093,33.28 IC1.8 18.999,33.28 19.419,33.7 v1@19.6,33.7
  Bottom Layer w0.6: R9.1 5.5,56.1 6.2,55.4 6.2,40.251 6.551,39.9 6.999,39.9 7.35,39.549 7.35,38.1 7.95,37.5 8.301,35.8 8.301,35.399 ccw(c8.7,35.399) 8.305,35.348 8.65,35.003 ccw(c8.7,35.399) 8.7,35 16.36,35 ; C8.2 15.45,37.25 16.36,36.34 16.36,35 ; IC1.8 16.36,35 ; v1(19.88,33.713) FB1.1@21.613,33.713 ; FB1.1@21.613,33.811 FB1.1@21.613,33.713 ; FB1.1 21.781,33.713 FB1.1@21.613,33.713 ; 44.25,16.5 44.101,16.5 43.75,16.149 43.75,7.5 48.213,3.037 48.213,1.837 U1.19 ; 44.31,16.5 C3.1 ; PS1.4@53.5,6.892 57.608,6.892 59.46,5.04 C4.1 55,2.25 51,6.25 51,14.75 49.25,16.5 C3.1 ; FB1.1@21.613,33.713 21.613,31.387 23.5,29.5 41.797,29.5 41.821,29.476 44.379,29.476 44.403,29.5 49.75,29.5 50.5,28.75 50.5,26.25 49.75,25.5 46.851,25.5 46.5,25.149 C3.1
+5V_HLW: C6.1 C7.1 FB1.2 U2.1 | length 16.5
  Bottom Layer w0.6: U2.1 21.595,45.5 20.351,45.5 20,45.149 20,37.7 20.847,36.853 21.297,36.853 21.7,36.45 C7.1@24.22,36.45 ; C7.1 26.852,36.376 C6.1
AGND: C6.2 C7.2 C9.1 C11.1 C12.1 D3.2 D4.1 J1.1 R4.2 R7.1 R14.1 R17.1 T1.4 U2.5 | length 110.9
  Top Layer w0.6: v1(28,53.75) 27.872,53.622 26.973,53.622 26.75,53.399 26.75,42.5 29.5,39.75 v1(29.5,37)
  Bottom Layer w0.6: R7.1@11.75,65.451 14.899,65.451 15.25,65.802 15.25,69.5 16.739,70.989 D4.1@18.004,70.989 ; D4.1 17.75,72.749 18.101,73.1 29.649,73.1 30,72.749 J1.1 30,67.058 29.649,66.707 R14.1 v1(28,53.75) C12.1 ; C11.1 20.65,62.75 R17.1 27.649,62.75 ; C7.2 26.926,33.824 C6.2 ; U2.5@25.5,39.93 26.57,39.93 v1(29.5,37) 29.5,34.024 ; C6.2@27.8,33.774 29.25,33.774 29.5,34.024 ; C9.1@32.25,32.75 32.25,31.5 ; T1.4 47.676,34.326 47.676,33.676 47.015,33.015 D3.2 43.917,33.015 43.582,32.68 43.582,31.851 43.23,31.5 32.25,31.5 ; 29.5,34.024 29.5,32 30,31.5 32.25,31.5
CT_SIG: D4.2 J1.2 R14.2 R15.1 | length 18.2
  Bottom Layer w0.6: R15.1@17.75,62.776 17.75,66 ; D4.2 17.75,66 ; R14.2@22,66 17.75,66 ; R14.2 22.1,70.624 22.451,70.975 J1.2
ESP_RX2: R6.1 R11.2 U1.31 | length 26.4
  Top Layer w0.6: R6.1 21.314,45.25 23.5,45.25 24,44.75 24,41.25 24.75,40.5 25.75,40.5 27,39.25 27,35.5 27.5,35 30.674,35 31.026,34.649 31.026,29.026 30.5,28.5 30.5,27.23 U1.31
GND: BT1.NEG C1.2 C2.2 C3.2 C4.2 C8.1 IC1.4 PS1.3 R6.2 R7.2 U1.14 U1.20 U1.26 | length 191.8
  Top Layer w0.6: U1.20 2.53,25.738 2.881,25.387 17.387,25.387 17.77,25.77 U1.26 ; v1(18.25,37) 18.235,37.015 18.235,38.485 18.747,38.997 20.75,38.997 21.396,39.643 R6.2@21.038,40 ; v1(40.25,6) 45.75,6 46.5,6.75 v1(46.5,9.5)
  Bottom Layer w0.6: IC1.4 8.74,43.54 12,46.8 13.3,46.8 ; C2.2@10.95,5.875 11.075,6 20.75,6 ; C2.2@11,5.95 10.8,5.75 10.8,6.125 11,6.325 C1.2 ; C8.1 11.15,38.849 11.501,39.2 18.2,39.2 ; R7.2 11.25,57.163 13.25,55.163 BT1.NEG 13.25,46.85 13.3,46.8 ; U1.14 35.55,6 ; v1(40.25,6) 35.55,6 ; v1(46.5,9.5) C3.2 48.399,13 48.75,12.649 48.75,5.5 53.5,0.75 64.189,0.75 64.54,1.101 C4.2 64.54,6.54 64.891,6.892 PS1.3@71.5,6.892 ; 13.3,46.8 16.9,46.8 18.25,45.45 18.25,39.2 18.25,27.978 17.77,27.498 17.77,25.48 20.75,22.5 20.75,6 ; 20.75,6 35.55,6
HLW_IN: C10.1 C12.2 R17.2 U2.3 | length 19.7
  Bottom Layer w0.6: C10.1@19.5,53.75 C12.2 ; R17.2@23.451,56.221 25.023,56.221 R17.2@25.5,56.699 ; U2.3 24.135,51.049 23.784,51.4 22.701,51.4 22.35,51.751 C12.2 ; R17.2 24.449,56.75 22.701,56.75 22.35,56.399 C12.2
HLW_IP: C10.2 C11.2 R15.2 U2.2 | length 24.1
  Bottom Layer w0.6: R15.2 19.974,56.724 20.6,57.35 C11.2 ; R15.2@17.576,56.573 16.826,56.573 16.5,56.247 16.5,53.75 16.5,50.6 18,49.1 22.514,49.1 22.865,48.749 U2.2@22.865,45.324
HLW_TX: R11.1 U2.6 | length 8.9
  Top Layer w0.6: v1@23.959,38.491 24.9,37.55 R11.1@24.9,32.176
  Bottom Layer w0.6: v1@24.135,38.315 U2.6
  other v1: 24.15,38.3
HLW_VP: C9.2 R12.2 U2.4 | length 19.9
  Bottom Layer w0.6: U2.4 25.405,45.5 26.399,45.5 26.75,45.149 26.75,42.5 32.25,37 ; C9.2@32.25,35.75 32.25,36 32.25,37 ; R12.2 32.25,37
I2C_SCL: IC1.6 R2.1 U1.22 | length 22.9
  Bottom Layer w0.6: IC1.6 11.28,30.101 10.929,29.75 7.961,29.75 7.61,29.399 U1.22 7.702,27.108 7.702,26.018 9.47,24.25 15.5,24.25 16.5,23.25 R2.1
I2C_SDA: IC1.5 R3.1 U1.21 | length 17.1
  Bottom Layer w0.6: IC1.5 5.07,29.61 U1.21 5.189,27.081 5.189,26.044 9.3,21.933 9.3,21.45 9.9,20.85 R3.1
L_FILT: L1.3 PS1.2 R5.2 | length 17.4
  Bottom Layer w1.5: R5.2 48.819,52.449 49.051,52.449 56.25,45.25 L1.3 ; L1.3@58.279,45.221 59.5,44 PS1.2
L_FUSED: C5.1 F1.2 L1.2 RV1.1 | length 40.9
  Bottom Layer w1.5: F1.2 39.08,70.249 39.33,70.499 54.501,70.499 58.5,66.5 58.5,61.6 55,58.1 C5.1@55,54.981 ; C5.1@55,55.011 55.057,55.011 55.057,54.843 58.25,51.65 L1.2
L_IN: F1.1 P1.2 | length 4.5
  Bottom Layer w1.5: F1.1 61.542,70.341 61.881,70.341 61.94,70.4 P1.2@65.919,70.4
LED_B: D1.1 U1.27 | length 20.4
  Top Layer w0.6: D1.1@3.75,31.73 3.75,30.351 4.101,30 19.5,30 20.31,29.19 U1.27
LED_W: D2.1 U1.28 | length 30.8
  Top Layer w0.6: D2.1 3.75,37.101 4.101,36.75 5.899,36.75 6.25,36.399 6.25,32.101 6.601,31.75 20.75,31.75 22.85,29.65 U1.28
N: C5.2 L1.1 P1.1 RV1.2 | length 25.1
  Bottom Layer w1.5: L1.1 68.25,51.5 70,53.25 C5.2@70,55.069 ; C5.2 66.029,59.121 66.029,60.079 65.979,60.129 65.979,62.879 71.04,67.94 P1.1
N_FILT: L1.4 PS1.1 T1.1 | length 31.9
  Bottom Layer w1.5: T1.1 47.854,44.496 49.254,44.496 57.75,36 64.621,36 65.5,36.879 PS1.1@65.5,40.492 ; PS1.1 65.5,44.371 66.379,45.25 L1.4
NetD1_2: D1.2 R1.1 | length 4.7
  Bottom Layer w0.6: R1.1 1.75,34.621 2.101,34.27 D1.2
NetD2_2: D2.2 R9.2 | length 8.5
  Bottom Layer w0.6: R9.2 2.6,49.9 2,49.3 2,43.7 2.4,43.3 3.72,43.3 D2.2
RTC_X1: IC1.1 Y1.1 | length 3.8
  Bottom Layer w0.6: Y1.1 16.05,41.53 IC1.1
RTC_X2: IC1.2 Y1.2 | length 3.8
  Bottom Layer w0.6: IC1.2 13.82,41.385 14.05,41.615 Y1.2
VBAT: BT1.POS IC1.3 | length 38
  Top Layer w0.6: v1(8.9,47.7) 9.028,47.572 10.307,47.572 11.28,46.599 IC1.3
  Bottom Layer w0.6: v1(8.9,47.7) 8.9,56.1 7.75,57.25 7.75,71.399 8.101,71.75 BT1.POS
VDIV_1: R5.1 R8.2 | length 4
  Bottom Layer w1.5: R8.2 44.823,60.084 48.795,60.084 R5.1
VDIV_2: R8.1 R10.2 | length 4
  Bottom Layer w1.5: R10.2 44.752,52.498 44.791,52.459 R8.1
VDIV_3: R10.1 R13.2 | length 4
  Bottom Layer w1.5: R13.2 R10.1
ZMPT_PRI: R13.1 T1.2 | length 9.2
  Bottom Layer w1.5: T1.2 35.152,44.502 35.973,44.502 36.854,45.383 R13.1
ZMPT_SEC: D3.1 R4.1 R12.1 T1.3 | length 11.6
  Bottom Layer w0.6: T1.3 35.307,34.343 41.243,34.343 41.526,34.626 R12.1 D3.1@44.235,37
pads on no net: IC1.7 J1. U1.2 U1.3 U1.4 U1.5 U1.6 U1.7 U1.8 U1.9 U1.10 U1.11 U1.12 U1.13 U1.15 U1.16 U1.17 U1.18 U1.23 U1.24 U1.25 U1.29 U1.30 U1.32 U1.33 U1.34 U1.35 U1.36 U1.37 U1.38 U2.7 U2.8

## Text inside footprints (layer, text, board x,y; h text height)
BT1: Top Overlay "+" at 17.83,73.25 h1.27 r180